# EAGLE board MRCS-Tortoise-to-MP-Adapter-array (EAGLE 7.7.0)
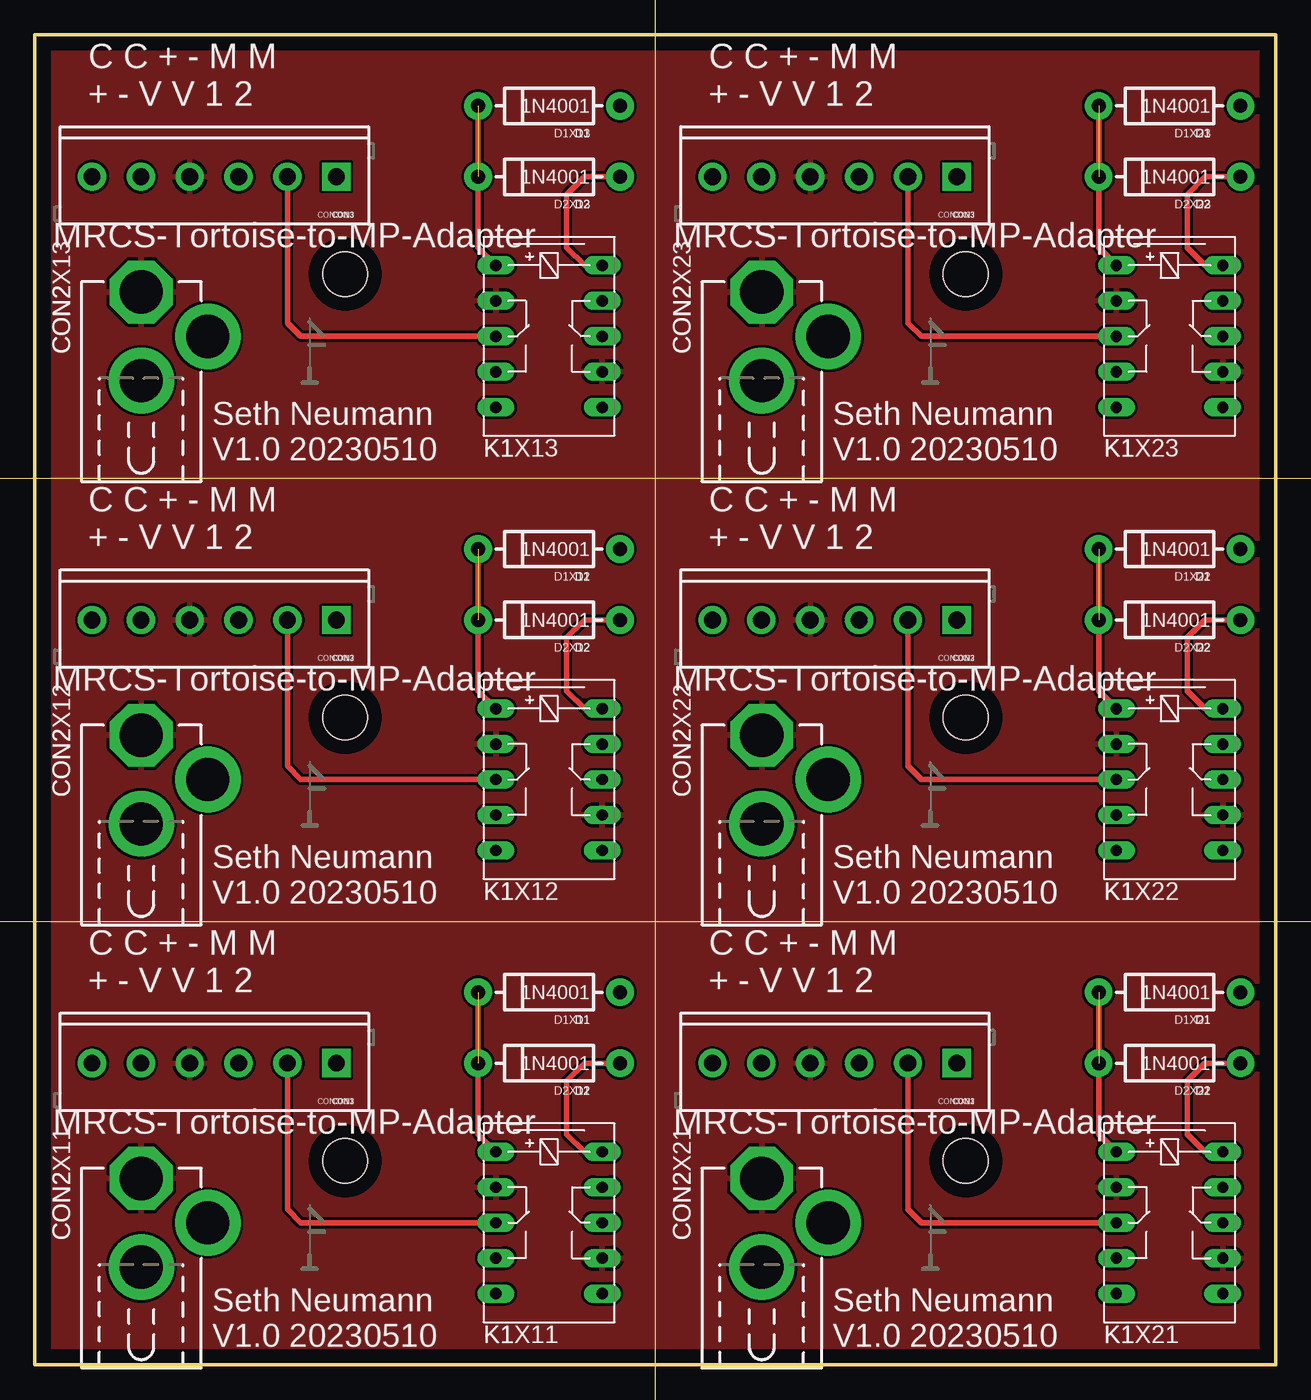
[diagram p0: board, top side]
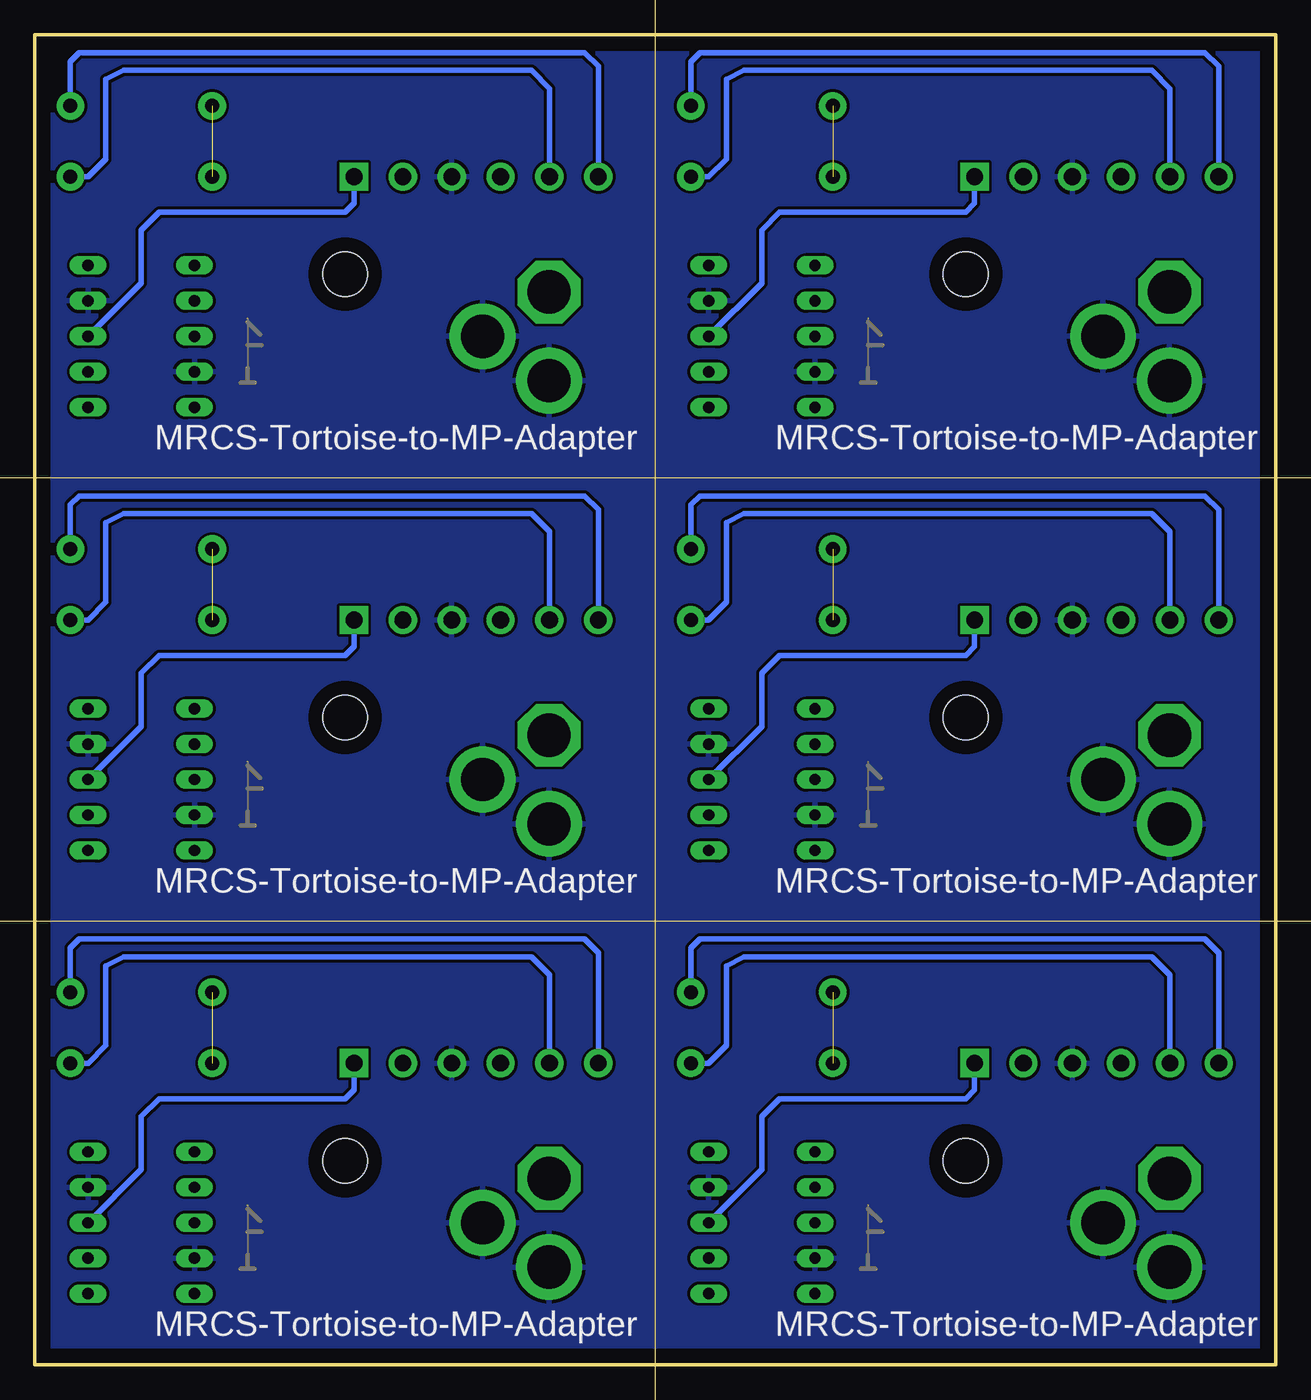
[diagram p1: board, bottom side, seen from below]

Size 88.9 x 95.25 mm. Coordinates in mm from the lower left corner, seen from the top.
Outline: 0,0 88.9,0 88.9,95.25 0,95.25 0,0
Copper layers (1*16): Top 0.035mm / dielectric 1.5mm / Bottom 0.035mm
Design rules "default": minimum track width 10mil, minimum drill 24mil, track to track 8mil, track to pad 8mil, pad to pad 8mil, via to via 8mil, smd to smd 8mil, copper to edge 40mil, drill to drill 8mil, minimum pad ring 10mil, minimum via ring 8mil, stop-mask expansion 4mil, vias tented up to drill 0mil, thermal gap 10mil
Holes 3.2 mm at 22.23,14.61 22.23,46.35 22.23,78.11 66.67,14.61 66.67,46.35 66.67,78.11
Milling: 3 lines

## Footprints (pad centres in the part's own frame; a part is rotated, then mirrored left to right if it is on the bottom)
DCJ0202 = drill 3.1 pad 4.5 octagon: 1 0,3.175 | drill 3.1 pad 4.7: 2 4.763,0; 3 0,-3.175
SCREWTERMINAL-3.5MM-6 = drill 1.2 pad 2.032 square: 1 0,0 | drill 1.2 pad 2.032: 2 3.5,0; 3 7,0; 4 10.5,0; 5 14,0; 6 17.5,0
DIODE-1N4001 = drill 1 pad 1.981: A 5.08,0; C -5.08,0
G6H2-100 = drill 0.813 long: 1 -5.08,-3.81; 5 5.08,-3.81; 6 5.08,3.81; 10 -5.08,3.81; O1 -2.54,-3.81; O2 -2.54,3.81; P1 0,-3.81; P2 0,3.81; S1 2.54,-3.81; S2 2.54,3.81

## Placement (x,y rotation side)
CON2X11  [DCJ0202]  7.62,10.16 0 top
CON2X12  [DCJ0202]  7.62,41.91 0 top
CON2X13  [DCJ0202]  7.62,73.66 0 top
CON2X21  [DCJ0202]  52.07,10.16 0 top
CON2X22  [DCJ0202]  52.07,41.91 0 top
CON2X23  [DCJ0202]  52.07,73.66 0 top
CON3X11  [SCREWTERMINAL-3.5MM-6]  21.59,21.59 180 top
CON3X12  [SCREWTERMINAL-3.5MM-6]  21.59,53.34 180 top
CON3X13  [SCREWTERMINAL-3.5MM-6]  21.59,85.09 180 top
CON3X21  [SCREWTERMINAL-3.5MM-6]  66.04,21.59 180 top
CON3X22  [SCREWTERMINAL-3.5MM-6]  66.04,53.34 180 top
CON3X23  [SCREWTERMINAL-3.5MM-6]  66.04,85.09 180 top
D1X11  1N4001  [DIODE-1N4001]  36.83,26.67 0 top
D1X12  1N4001  [DIODE-1N4001]  36.83,58.42 0 top
D1X13  1N4001  [DIODE-1N4001]  36.83,90.17 0 top
D1X21  1N4001  [DIODE-1N4001]  81.28,26.67 0 top
D1X22  1N4001  [DIODE-1N4001]  81.28,58.42 0 top
D1X23  1N4001  [DIODE-1N4001]  81.28,90.17 0 top
D2X11  1N4001  [DIODE-1N4001]  36.83,21.59 0 top
D2X12  1N4001  [DIODE-1N4001]  36.83,53.34 0 top
D2X13  1N4001  [DIODE-1N4001]  36.83,85.09 0 top
D2X21  1N4001  [DIODE-1N4001]  81.28,21.59 0 top
D2X22  1N4001  [DIODE-1N4001]  81.28,53.34 0 top
D2X23  1N4001  [DIODE-1N4001]  81.28,85.09 0 top
K1X11  G6H2-100  [G6H2-100]  36.83,10.16 270 top
K1X12  G6H2-100  [G6H2-100]  36.83,41.91 270 top
K1X13  G6H2-100  [G6H2-100]  36.83,73.66 270 top
K1X21  G6H2-100  [G6H2-100]  81.28,10.16 270 top
K1X22  G6H2-100  [G6H2-100]  81.28,41.91 270 top
K1X23  G6H2-100  [G6H2-100]  81.28,73.66 270 top
U$1X11  [MRCSLOGOTOP]  18.41,6.35 0 top
U$1X12  [MRCSLOGOTOP]  18.41,38.1 0 top
U$1X13  [MRCSLOGOTOP]  18.41,69.85 0 top
U$1X21  [MRCSLOGOTOP]  62.87,6.35 0 top
U$1X22  [MRCSLOGOTOP]  62.87,38.1 0 top
U$1X23  [MRCSLOGOTOP]  62.87,69.85 0 top
U$2X11  [CA-PROP65WARNING]  24.13,26.67 0 top
U$2X12  [CA-PROP65WARNING]  24.13,58.42 0 top
U$2X13  [CA-PROP65WARNING]  24.13,90.17 0 top
U$2X21  [CA-PROP65WARNING]  68.58,26.67 0 top
U$2X22  [CA-PROP65WARNING]  68.58,58.42 0 top
U$2X23  [CA-PROP65WARNING]  68.58,90.17 0 top
U$3X11  [MRCSLOGOBTM]  22.86,6.35 0 top
U$3X12  [MRCSLOGOBTM]  22.86,38.1 0 top
U$3X13  [MRCSLOGOBTM]  22.86,69.85 0 top
U$3X21  [MRCSLOGOBTM]  67.31,6.35 0 top
U$3X22  [MRCSLOGOBTM]  67.31,38.1 0 top
U$3X23  [MRCSLOGOBTM]  67.31,69.85 0 top

## Library data of the parts
CON2X11-CON2X13 CON2X21-CON2X23 CON3X11-CON3X13 CON3X21-CON3X23 D1X11-D1X13 D1X21-D1X23 D2X11-D2X13 D2X21-D2X23 = SPCoast
K1X11-K1X13 K1X21-K1X23 = relay
U$1X11-U$1X13 U$1X21-U$1X23 = MRCSLogoTop
U$2X11-U$2X13 U$2X21-U$2X23 = MRCS-prop65warningBtm
U$3X11-U$3X13 U$3X21-U$3X23 = MRCSLogoBtm

## Nets
GNDX11: CON2X11.2 CON2X11.3 CON3X11.3 K1X11.O2 K1X11.S1
GNDX12: CON2X12.2 CON2X12.3 CON3X12.3 K1X12.O2 K1X12.S1
GNDX13: CON2X13.2 CON2X13.3 CON3X13.3 K1X13.O2 K1X13.S1
GNDX21: CON2X21.2 CON2X21.3 CON3X21.3 K1X21.O2 K1X21.S1
GNDX22: CON2X22.2 CON2X22.3 CON3X22.3 K1X22.O2 K1X22.S1
GNDX23: CON2X23.2 CON2X23.3 CON3X23.3 K1X23.O2 K1X23.S1
N$1X11: CON3X11.6 D1X11.A
N$1X12: CON3X12.6 D1X12.A
N$1X13: CON3X13.6 D1X13.A
N$1X21: CON3X21.6 D1X21.A
N$1X22: CON3X22.6 D1X22.A
N$1X23: CON3X23.6 D1X23.A
N$2X11: D1X11.C D2X11.C K1X11.1
N$2X12: D1X12.C D2X12.C K1X12.1
N$2X13: D1X13.C D2X13.C K1X13.1
N$2X21: D1X21.C D2X21.C K1X21.1
N$2X22: D1X22.C D2X22.C K1X22.1
N$2X23: D1X23.C D2X23.C K1X23.1
N$3X11: CON3X11.5 D2X11.A K1X11.10
N$3X12: CON3X12.5 D2X12.A K1X12.10
N$3X13: CON3X13.5 D2X13.A K1X13.10
N$3X21: CON3X21.5 D2X21.A K1X21.10
N$3X22: CON3X22.5 D2X22.A K1X22.10
N$3X23: CON3X23.5 D2X23.A K1X23.10
N$6X11: CON3X11.2 K1X11.P1
N$6X12: CON3X12.2 K1X12.P1
N$6X13: CON3X13.2 K1X13.P1
N$6X21: CON3X21.2 K1X21.P1
N$6X22: CON3X22.2 K1X22.P1
N$6X23: CON3X23.2 K1X23.P1
N$7X11: CON3X11.1 K1X11.P2
N$7X12: CON3X12.1 K1X12.P2
N$7X13: CON3X13.1 K1X13.P2
N$7X21: CON3X21.1 K1X21.P2
N$7X22: CON3X22.1 K1X22.P2
N$7X23: CON3X23.1 K1X23.P2
VINX11: CON2X11.1 CON3X11.4 K1X11.O1 K1X11.S2
VINX12: CON2X12.1 CON3X12.4 K1X12.O1 K1X12.S2
VINX13: CON2X13.1 CON3X13.4 K1X13.O1 K1X13.S2
VINX21: CON2X21.1 CON3X21.4 K1X21.O1 K1X21.S2
VINX22: CON2X22.1 CON3X22.4 K1X22.O1 K1X22.S2
VINX23: CON2X23.1 CON3X23.4 K1X23.O1 K1X23.S2

## Tracks (layer width: path | path; a pad name or v marks a point on that pad's centre or on a via)
GNDX11
  pour Bottom: 0,0 44.45,0 44.45,31.75 0,31.75
GNDX12
  pour Bottom: 0,31.75 44.45,31.75 44.45,63.5 0,63.5
GNDX13
  pour Bottom: 0,63.5 44.45,63.5 44.45,95.25 0,95.25
GNDX21
  pour Bottom: 44.45,0 88.9,0 88.9,31.75 44.45,31.75
GNDX22
  pour Bottom: 44.45,31.75 88.9,31.75 88.9,63.5 44.45,63.5
GNDX23
  pour Bottom: 44.45,63.5 88.9,63.5 88.9,95.25 44.45,95.25
N$1X11
  Bottom 0.406: D1X11.A 41.91,29.84 41.27,30.48 5.08,30.48 4.09,29.49 CON3X11.6
N$1X12
  Bottom 0.406: D1X12.A 41.91,61.59 41.27,62.23 5.08,62.23 4.09,61.24 CON3X12.6
N$1X13
  Bottom 0.406: D1X13.A 41.91,93.34 41.27,93.98 5.08,93.98 4.09,92.99 CON3X13.6
N$1X21
  Bottom 0.406: D1X21.A 86.36,29.84 85.72,30.48 49.53,30.48 48.54,29.49 CON3X21.6
N$1X22
  Bottom 0.406: D1X22.A 86.36,61.59 85.72,62.23 49.53,62.23 48.54,61.24 CON3X22.6
N$1X23
  Bottom 0.406: D1X23.A 86.36,93.34 85.72,93.98 49.53,93.98 48.54,92.99 CON3X23.6
N$2X11  (1 unrouted)
  Top 0.406: D1X11.C 31.75,16.51 K1X11.1
N$2X12  (1 unrouted)
  Top 0.406: D1X12.C 31.75,48.26 K1X12.1
N$2X13  (1 unrouted)
  Top 0.406: D1X13.C 31.75,80.01 K1X13.1
N$2X21  (1 unrouted)
  Top 0.406: D1X21.C 76.2,16.51 K1X21.1
N$2X22  (1 unrouted)
  Top 0.406: D1X22.C 76.2,48.26 K1X22.1
N$2X23  (1 unrouted)
  Top 0.406: D1X23.C 76.2,80.01 K1X23.1
N$3X11
  Top 0.406: K1X11.10 39.37,15.24 38.1,16.51 38.1,20.32 39.37,21.59 D2X11.A
  Bottom 0.406: CON3X11.5 7.59,27.91 8.89,29.21 38.1,29.21 39.37,28.57 39.37,22.86 40.64,21.59 D2X11.A
N$3X12
  Top 0.406: K1X12.10 39.37,46.99 38.1,48.26 38.1,52.07 39.37,53.34 D2X12.A
  Bottom 0.406: CON3X12.5 7.59,59.66 8.89,60.96 38.1,60.96 39.37,60.33 39.37,54.61 40.64,53.34 D2X12.A
N$3X13
  Top 0.406: K1X13.10 39.37,78.74 38.1,80.01 38.1,83.82 39.37,85.09 D2X13.A
  Bottom 0.406: CON3X13.5 7.59,91.41 8.89,92.71 38.1,92.71 39.37,92.08 39.37,86.36 40.64,85.09 D2X13.A
N$3X21
  Top 0.406: K1X21.10 83.82,15.24 82.55,16.51 82.55,20.32 83.82,21.59 D2X21.A
  Bottom 0.406: CON3X21.5 52.04,27.91 53.34,29.21 82.55,29.21 83.82,28.57 83.82,22.86 85.09,21.59 D2X21.A
N$3X22
  Top 0.406: K1X22.10 83.82,46.99 82.55,48.26 82.55,52.07 83.82,53.34 D2X22.A
  Bottom 0.406: CON3X22.5 52.04,59.66 53.34,60.96 82.55,60.96 83.82,60.33 83.82,54.61 85.09,53.34 D2X22.A
N$3X23
  Top 0.406: K1X23.10 83.82,78.74 82.55,80.01 82.55,83.82 83.82,85.09 D2X23.A
  Bottom 0.406: CON3X23.5 52.04,91.41 53.34,92.71 82.55,92.71 83.82,92.08 83.82,86.36 85.09,85.09 D2X23.A
N$6X11
  Top 0.406: CON3X11.2 18.09,11.12 19.05,10.16 K1X11.P1
N$6X12
  Top 0.406: CON3X12.2 18.09,42.87 19.05,41.91 K1X12.P1
N$6X13
  Top 0.406: CON3X13.2 18.09,74.62 19.05,73.66 K1X13.P1
N$6X21
  Top 0.406: CON3X21.2 62.54,11.12 63.5,10.16 K1X21.P1
N$6X22
  Top 0.406: CON3X22.2 62.54,42.87 63.5,41.91 K1X22.P1
N$6X23
  Top 0.406: CON3X23.2 62.54,74.62 63.5,73.66 K1X23.P1
N$7X11
  Bottom 0.406: K1X11.P2 36.83,13.97 36.83,17.78 35.56,19.05 22.23,19.05 21.59,19.68 CON3X11.1
N$7X12
  Bottom 0.406: K1X12.P2 36.83,45.72 36.83,49.53 35.56,50.8 22.23,50.8 21.59,51.44 CON3X12.1
N$7X13
  Bottom 0.406: K1X13.P2 36.83,77.47 36.83,81.28 35.56,82.55 22.23,82.55 21.59,83.19 CON3X13.1
N$7X21
  Bottom 0.406: K1X21.P2 81.28,13.97 81.28,17.78 80.01,19.05 66.67,19.05 66.04,19.68 CON3X21.1
N$7X22
  Bottom 0.406: K1X22.P2 81.28,45.72 81.28,49.53 80.01,50.8 66.67,50.8 66.04,51.44 CON3X22.1
N$7X23
  Bottom 0.406: K1X23.P2 81.28,77.47 81.28,81.28 80.01,82.55 66.67,82.55 66.04,83.19 CON3X23.1
VINX11
  pour Top: 0,0 44.45,0 44.45,31.75 0,31.75
VINX12
  pour Top: 0,31.75 44.45,31.75 44.45,63.5 0,63.5
VINX13
  pour Top: 0,63.5 44.45,63.5 44.45,95.25 0,95.25
VINX21
  pour Top: 44.45,0 88.9,0 88.9,31.75 44.45,31.75
VINX22
  pour Top: 44.45,31.75 88.9,31.75 88.9,63.5 44.45,63.5
VINX23
  pour Top: 44.45,63.5 88.9,63.5 88.9,95.25 44.45,95.25

## Text on the board
tPlace: C C + - M M / + - V V 1 2 | C C + - M M / + - V V 1 2 | MRCS-Tortoise-to-MP-Adapter | MRCS-Tortoise-to-MP-Adapter | Seth Neumann / V1.0 20230510 | Seth Neumann / V1.0 20230510 | C C + - M M / + - V V 1 2 | C C + - M M / + - V V 1 2 | MRCS-Tortoise-to-MP-Adapter | MRCS-Tortoise-to-MP-Adapter | Seth Neumann / V1.0 20230510 | Seth Neumann / V1.0 20230510 | C C + - M M / + - V V 1 2 | C C + - M M / + - V V 1 2 | MRCS-Tortoise-to-MP-Adapter | MRCS-Tortoise-to-MP-Adapter | Seth Neumann / V1.0 20230510 | Seth Neumann / V1.0 20230510
bPlace: MRCS-Tortoise-to-MP-Adapter | MRCS-Tortoise-to-MP-Adapter | MRCS-Tortoise-to-MP-Adapter | MRCS-Tortoise-to-MP-Adapter | MRCS-Tortoise-to-MP-Adapter | MRCS-Tortoise-to-MP-Adapter
Milling: V-Score | V-Score | V-Score
_tNames: D1 | D1 | D1 | D1 | CON3 | CON3 | D2 | D2 | CON3 | CON3 | D2 | D2 | CON2 | CON2 | CON2 | CON2 | K1 | K1 | D1 | D1 | D1 | D1 | D2 | D2 | D2 | D2 | CON3 | CON3 | CON3 | CON3 | CON2 | CON2 | CON2 | CON2 | K1 | K1 | D1 | D1 | D1 | D1 | D2 | D2 | D2 | D2 | CON3 | CON3 | CON3 | CON3 | CON2 | CON2 | CON2 | CON2 | K1 | K1